# Altium PCB PCB.PcbDoc
Units mm, origin at the board's own origin, x right, y up, seen from the top; angles counter-clockwise.
Board outline 50 x 50 mm, 2 copper layers (Top Layer, Bottom Layer); 15 components, 14 nets, 64 pads, 0 vias.
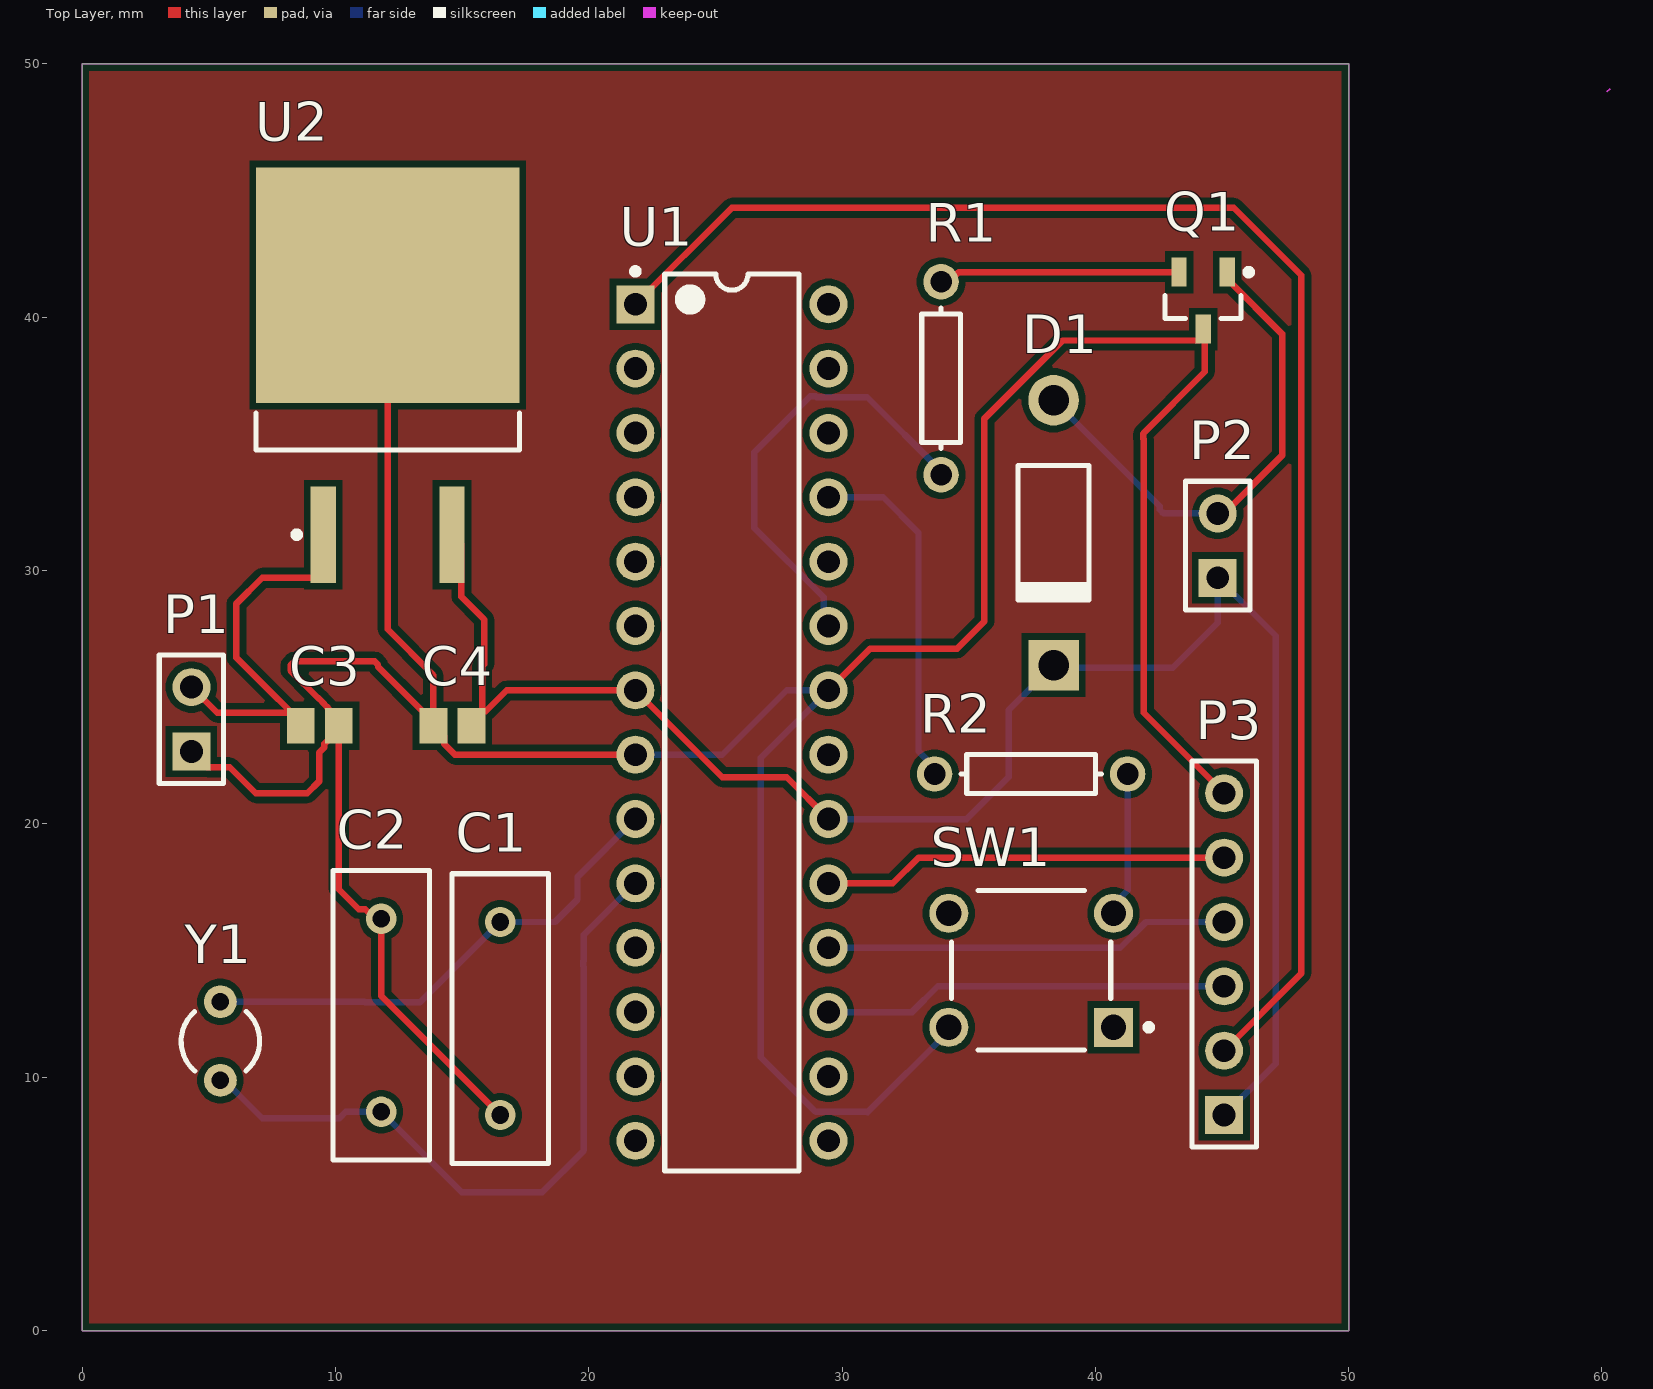
[diagram p0: Top Layer view]
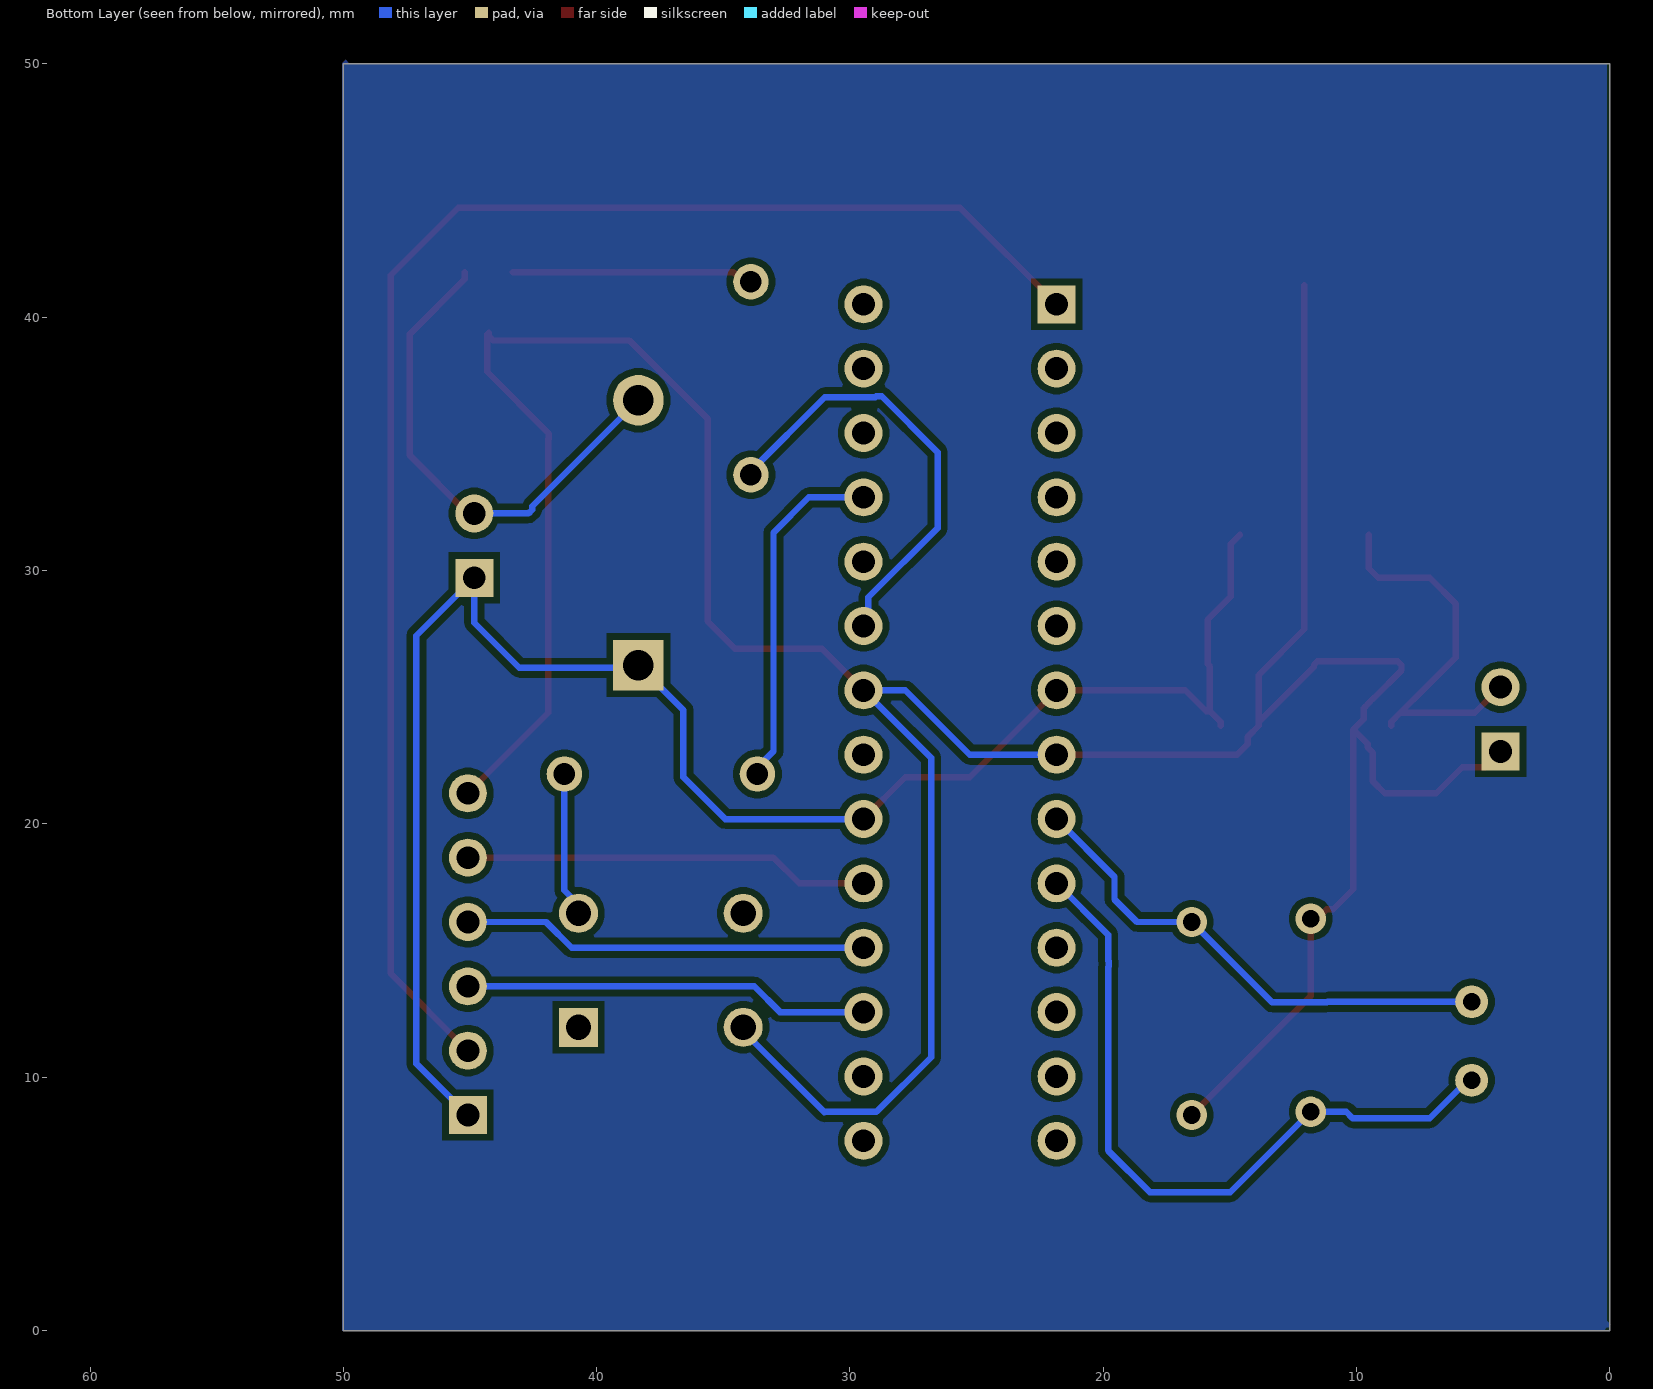
[diagram p1: Bottom Layer view, seen from below]

## Layer stack, top to bottom
Top Solder: solder mask 0.0102, Solder Resist, Dk 3.5
Top Layer: signal copper 0.0356
Dielectric 1: dielectric 0.32, FR-4, Dk 4.8
Bottom Layer: signal copper 0.0356
Bottom Solder: solder mask 0.0102, Solder Resist, Dk 3.5

## Board outline
0,0 0,50 50,50 50,0

## Design rules (kind name [scope] priority, off if disabled: settings)
Clearance [All] p1: gap=0.254 ignorepadtopadclearanceinfootprint=FALSE except(0: Arc-Hole Track-Hole SMDPad-Hole THPad-Hole Via-Hole Fill-Hole Poly-Hole Region-Hole Text-Hole)
PolygonConnect [All] p1: connectstyle=Relief reliefconductorwidth=0.254 reliefentries=4 polygonreliefangle="90 Angle" airgapwidth=0.254
RoutingVias [All] p1: holewidth=0.711 width=1.27 viastyle="Through Hole" minholewidth=0.711 minwidth=1.27 maxholewidth=0.711 maxwidth=1.27
SolderMaskExpansion [All] p1: expansion=0.102 istentingtop=FALSE
Width [All] p1: maxlimit=0.254 minlimit=0.254 preferedwidth=0.254
30 further rules are at their usual default settings.

## Classes and differential pairs
component class SCHEMATIC: C1 C2 C3 C4 D1 P1 P2 Q1 R1 R2 SW1 U1 U2 Y1

## Components (designator, comment, footprint, x,y, rotation, side; value= is the part's Value field where it differs from the comment)
C1 "22pF" RAD-0.3 16.51,12.319 r90 top value=100nF
C2 "22pF" RAD-0.3 11.811,12.446 r270 top value=100nF
C3 "330nF" C0805 9.386,23.876 r0 top value=100pF
C4 "100nF" C0805 14.617,23.876 r180 top value=100pF
D1 "1N4001" DO-41 38.354,31.496 r270 top
P1 "POWER" HDR1X2 4.318,22.86 r90 top (schematic designator ?)
P2 "SPEAKER" HDR1X2 44.831,29.718 r90 top (schematic designator P?)
P3 "USBASP" HDR1X6 45.085,8.509 r90 top
Q1 "NPN" SOT-23B_N 44.257,40.658 r270 top
R1 "220R" AXIAL-0.3 33.909,37.592 r90 top value=470
R2 "Res1" AXIAL-0.3 37.465,21.971 r0 top value=10k
SW1 "" FP-1-1825910-0-MFG 37.465,14.224 r0 top
U1 "ATmega328P-PU" 28P3 25.654,24.003 r0 top
U2 "L7805CD2T-TR" TO-263_N 12.065,37.719 r90 top
Y1 "XTAL" R38 5.461,11.43 r0 top (schematic designator Y?)

## Footprints (in the part's own frame and the unit in brackets; to place one, negate y for a bottom-side part, rotate by r counter-clockwise, add the part's x,y. Pads: shape width x height; smd on the part's side, far side on the other; paste and mask are expansions set on the pad)
28P3 [mm] "28-Pin Plastic Dual In-Line Package (PDIP)"
  rect 1.5x1.5 hole 0.9: 1(-3.81,16.51)
  round 1.5 hole 0.9: 2(-3.81,13.97) 3(-3.81,11.43) 4(-3.81,8.89) 5(-3.81,6.35) 6(-3.81,3.81) 7(-3.81,1.27) 8(-3.81,-1.27) 9(-3.81,-3.81) 10(-3.81,-6.35) 11(-3.81,-8.89) 12(-3.81,-11.43) 13(-3.81,-13.97) 14(-3.81,-16.51) 15(3.81,-16.51) 16(3.81,-13.97) 17(3.81,-11.43) 18(3.81,-8.89) 19(3.81,-6.35) 20(3.81,-3.81) 21(3.81,-1.27) 22(3.81,1.27) 23(3.81,3.81) 24(3.81,6.35) 25(3.81,8.89) 26(3.81,11.43) 27(3.81,13.97) 28(3.81,16.51)
  silkscreen extent -3.93,-17.7 2.65,17.93, body extent -3.6,-17.65 3.6,17.65, height 4.58
AXIAL-0.3 [mm] "Axial Device, Thru-Hole; 2 Leads; 0.3 in Pin Spacing"
  round 1.4 hole 0.85: 1(-3.81,0) 2(3.81,0)
  silkscreen extent -2.77,-0.76 2.77,0.76
C0805 [mm] "Chip Capacitor, Body 2.0x1.3mm, IPC High Density"
  rect 1.1x1.4 smd: 1(-0.75,0) 2(0.75,0)
  body extent -1.1,-0.72 1.1,0.72, height 1.4
DO-41 [mm] "Diode, Axial; Body 5.2 x 2.7 mm (LxDia. max), Lead Dia. 0.86 mm (max)"
  round 2 hole 1.2: 1(-5.23,0)
  rect 2x2 hole 1.2: 2(5.23,0)
  silkscreen extent -2.65,-1.4 2.75,1.4
FP-1-1825910-0-MFG [mm]
  rect 1.54x1.54 hole 0.99 paste-1000 mask+0: 1(3.25,-2.25)
  round 1.54 hole 0.99 paste-1000 mask+0: 2(-3.25,-2.25) 3(3.25,2.25) 4(-3.25,2.25)
  silkscreen extent -3.15,-3.15 4.77,3.15, body extent -4.12,-3.24 4.12,3.24, height 0.25
HDR1X2 [mm] "Connector; Header; 2 Position"
  rect 1.5x1.5 hole 0.9: 1(0,0)
  round 1.5 hole 0.9: 2(2.54,0)
  silkscreen extent -1.27,-1.27 3.81,1.27
HDR1X6 [mm] "Connector; Header; 6 Position"
  rect 1.5x1.5 hole 0.9: 1(0,0)
  round 1.5 hole 0.9: 2(2.54,0) 3(5.08,0) 4(7.62,0) 5(10.16,0) 6(12.7,0)
  silkscreen extent -1.27,-1.27 13.97,1.27
R38 [mm] "Crystal, Thru-Hole; 2 Leads; Body 3.1 x 8.2 mm (Dia.xH)"
  round 1.3 hole 0.7: 1(0,1.55) 2(0,-1.55)
  silkscreen extent -1.55,-1.19 1.55,1.17
RAD-0.3 [mm] "Radial Cap, Thru-Hole; 2 Leads; 0.3 in Pin Spacing"
  round 1.2 hole 0.7: 1(-3.81,0) 2(3.81,0)
  silkscreen extent -5.71,-1.91 5.71,1.91
SOT-23B_N [mm] "SOT23, 3-Leads, Body 2.9x1.3mm, Pitch 0.95mm, Lead Span 2.4mm, IPC Medium Density"
  rect 1.15x0.6 smd: 1(-1.125,0.95) 2(-1.125,-0.95) 3(1.125,0)
  silkscreen extent -1.25,-1.5 0.7,1.93, body extent -0.7,-1.5 0.7,1.5, height 1.14
TO-263_N [mm] "D2-PAK, 4-Leads, Body 9.2x10.2mm, Pitch 2.54mm, Lead Span 15.4mm, IPC Medium Density"
  rect 3.8x1 smd: 1(-6.3,2.54) 3(-6.3,-2.54)
  rect 9.3x10.4 smd: 4(3.55,0)
  silkscreen extent -6.42,-5.2 -1.5,5.2, body extent -2.95,-5.2 6.4,5.2, height 4.6

## Part data
C1 C2: library part Cap, "Capacitor", LatestRevisionDate=17-Jul-2002, LatestRevisionNote="Re-released for DXP Platform.", PackageDescription="Radial Cap, Thru-Hole; 2 Leads; 0.3 in Pin Spacing", PackageReference=RAD-0.3, Published=8-Jun-2000, Publisher="Altium Limited"
C3 C4: library part "Cap Pol3", "Polarized Capacitor (Surface Mount)", LatestRevisionDate=29-May-2009, LatestRevisionNote="IPC-7351 Footprint Added.", PackageDescription="Chip Capacitor", PackageReference=C0805, Published=8-Jun-2000, Publisher="Altium Limited"
D1: library part "Diode 1N4001", "1 Amp General Purpose Rectifier", Code_JEDEC=DO-204-AL, ComponentLink1Description="Manufacturer Link", ComponentLink1URL=http://www.fairchildsemi.com/, ComponentLink2Description=Datasheet, ComponentLink2URL=http://www.fairchildsemi.com/ds/1N%2F1N4001.pdf, DatasheetVersion=1998, LatestRevisionDate=17-Jul-2002, LatestRevisionNote="Re-released for DXP Platform.", PackageDescription="Diode, Axial; Body 5.2 x 2.7 mm (LxDia. max), Lead Dia. 0.86 mm (max)", PackageReference=DO-41, PackageVersion=Aug-1999, Published=8-Jun-2000, Publisher="Altium Limited"
P1 P2: library part "Header 2", "Header, 2-Pin", LatestRevisionDate=17-Jul-2002, LatestRevisionNote="Re-released for DXP Platform.", Publisher="Altium Limited"
P3: library part "Header 6", "Header, 6-Pin", LatestRevisionDate=17-Jul-2002, LatestRevisionNote="Re-released for DXP Platform.", Publisher="Altium Limited"
Q1: library part QNPN, "NPN Bipolar Transistor", LatestRevisionDate=29-May-2009, LatestRevisionNote="IPC-7351 Footprint Added.", PackageDescription="3-Pin SOT-23 Package 0.95 mm Pitch, 2.4 mm Lead Span", PackageReference=SOT-23B, PackageVersion=Aug-1999, Published=8-Jun-2000, Publisher="Altium Limited"
R1: library part Res1, "Resistor", LatestRevisionDate=17-Jul-2002, LatestRevisionNote="Re-released for DXP Platform.", PackageDescription="Axial Device, Thru-Hole; 2 Leads; 0.3 in Pin Spacing", PackageReference=AXIAL-0.3, Published=8-Jun-2000, Publisher="Altium Limited"
R2: "Resistor", LatestRevisionDate=17-Jul-2002, LatestRevisionNote="Re-released for DXP Platform.", PackageDescription="Axial Device, Thru-Hole; 2 Leads; 0.3 in Pin Spacing", PackageReference=AXIAL-0.3, Published=8-Jun-2000, Publisher="Altium Limited"
SW1: library part CMP-03407-000018-1, "SWITCH TACTILE SPST-NO 0.05A 24V", Actuator Color=Blue, Contact Current Rating=50mA, Contact Resistance=100mR, Max Operating Temperature=85°C, Max Voltage Rating (DC)=24V, Min Operating Temperature=-35°C, Operating Force=1.56N, Package Quantity=750, Actuator Length=3.4mm, Actuator Material=Nylon, Actuator Type=Standard, Contact Material=Brass, Contact Plating=Silver, Depth=5.99mm, Electrical Life=100000Cycles, Illumination Type=Non-Illuminated, Length=5.99mm, Max Current Rating=50mA, Mechanical Life=100000Cycles, Mount="Through Hole", Orientation=Straight, Packaging="Loose Piece", Radiation Hardening=No, RoHS Compliant=Yes, Series="FSMJ, Alcoswitch", Switch Function=Off-Mom, Switch Travel=0.25mm, Termination="PC Pins", Throw Configuration=SPST, Type=Switch, Voltage Rating (DC)=24V
U1: library part CMP-0095-00013-2, "8-bit AVR Microcontroller, 32KB Flash, 1KB EEPROM, 2KB SRAM, 28-pin PDIP, Industrial Grade (-40°C to 85°C)", ComponentLink1Description="Manufacturer URL", ComponentLink1URL=http://www.atmel.com/, ComponentLink2Description="ATmega48A/48PA/88A/88PA/168A/168PA/328/328P Datasheet", ComponentLink2URL=http://www.atmel.com/dyn/resources/prod_documents/8271.pdf, ComponentLink3Description="ATmega48A/48PA/88A/88PA/168A/168PA/328/328P Summary", ComponentLink3URL=http://www.atmel.com/dyn/resources/prod_documents/8271S.pdf, DatasheetVersion="revD, May-2011", PackageDescription="28-lead (0.300\"/7.62mm Wide) Plastic Dual Inline Package (PDIP)", PackageReference=28P3, PackageVersion="revB, Sep-2001", RevisionNote="DatasheetVersion updated. URLs added."
U2: library part CMP-0244-00213-1, "Positive Voltage Regulator, 3-Pin D2PAK, Tape and Reel", ComponentLink1Description="Manufacturer URL", ComponentLink1URL=http://www.st.com, ComponentLink2Description=Datasheet, ComponentLink2URL=http://www.st.com/internet/com/TECHNICAL_RESOURCES/TECHNICAL_LITERATURE/DATASHEET/CD00000444.pdf, DatasheetVersion=16/11/2011, PackageDescription="3-Pin Transistor Outline Package 2.54 mm Pitch, 15.4 mm Lead Span (D2PAK)", PackageReference=TO-263, PackageVersion=2011
Y1: "Crystal Oscillator", LatestRevisionDate=17-Jul-2002, LatestRevisionNote="Re-released for DXP Platform.", PackageDescription="Crystal, Thru-Hole; 2 Leads; Body 3.1 x 8.2 mm (Dia.xH)", PackageReference=R38, Published=8-Jun-2000, Publisher="Altium Limited"

## Nets (pads, with @x,y where several pads share a name; then routed paths per layer and width w, separated by ;. In a path a pad name is that pad's centre, name@x,y a point inside that pad or via, vN(x,y) a via of type N, cw(c..) or ccw(c..) an arc to the next point about the centre after c; other vN are vias at no path point)
GND: C1.1 C2.1 C3.2 C4.2 P1.1 P3.6 Q1.3 SW1.2 U1.8 U1.22 U2.4 | length 143.3
  Top Layer w0.254: P1.1 4.941,22.237 5.83,22.237 6.858,21.209 8.89,21.209 9.356,21.675 9.356,22.807 9.567,23.018 9.567,23.157 C3.2@10.136,23.726 ; U2.4 12.065,27.68 13.867,25.878 C4.2@13.867,24.026 ; C1.1 11.811,13.208 C2.1 11.555,16.256 11.174,16.637 10.922,16.637 10.136,17.423 C3.2@10.136,23.726 ; U1.8 14.721,22.733 14.29,23.164 14.29,23.453 C4.2 C4.2@13.867,24.026 ; U1.22 31.115,26.924 34.544,26.924 35.623,28.003 35.623,36.004 38.704,39.085 44.084,39.085 44.257,39.258 44.257,39.395 44.323,39.329 44.323,37.846 41.888,35.411 41.888,35.201 41.91,35.179 41.91,24.384 P3.6 ; C3.2@10.136,23.726 9.713,24.149 9.713,24.573 9.567,24.719 9.567,24.734 9.344,24.957 9.329,24.957 8.23,26.057 8.23,26.267 8.378,26.416 11.557,26.416 11.684,26.289 11.684,26.209 C4.2@13.867,24.026
  Bottom Layer w0.254: U1.8 25.273,22.733 27.813,25.273 U1.22 26.797,22.606 26.797,10.795 28.956,8.636 30.988,8.636 31.01,8.614 34.215,11.819 SW1.2
NetC1_2: C1.2 U1.9 Y1.1 | length 19.9
  Bottom Layer w0.254: Y1.1 11.15,12.98 11.176,12.954 13.335,12.954 C1.2 18.669,16.129 19.558,17.018 19.558,17.907 U1.9
NetC2_2: C2.2 U1.10 Y1.2 | length 28.5
  Bottom Layer w0.254: Y1.2 5.614,9.88 7.112,8.382 10.16,8.382 10.414,8.636 C2.2 14.986,5.461 18.161,5.461 19.812,7.112 19.812,14.351 19.79,14.373 19.79,14.583 19.812,14.605 19.812,15.621 U1.10
NetD1_1: D1.1 P2.2 Q1.1 | length 20
  Top Layer w0.254: P2.2 45.085,32.258 47.371,34.544 47.371,39.344 45.207,41.508 Q1.1
  Bottom Layer w0.254: D1.1 42.545,32.535 42.545,32.407 42.694,32.258 P2.2
NetP3_2: P3.2 U1.1 | length 60.8
  Top Layer w0.254: U1.1 25.654,44.323 45.466,44.323 48.133,41.656 48.133,14.097 P3.2
NetP3_3: P3.3 U1.17 | length 16
  Bottom Layer w0.254: U1.17 32.766,12.573 33.782,13.589 P3.3
NetP3_4: P3.4 U1.18 | length 16
  Bottom Layer w0.254: U1.18 40.982,15.113 41.998,16.129 P3.4
NetP3_5: P3.5 U1.19 | length 16
  Top Layer w0.254: U1.19 32.004,17.653 33.02,18.669 P3.5
NetQ1_2: Q1.2 R1.2 | length 9.6
  Top Layer w0.254: R1.2 34.219,41.402 34.6,41.783 Q1.2
NetR1_1: R1.1 U1.23 | length 17.7
  Bottom Layer w0.254: U1.23 29.274,28.003 29.274,28.944 26.543,31.675 26.543,34.671 28.75,36.878 28.96,36.878 28.996,36.842 31,36.842 33.909,33.933 R1.1
NetR2_1: R2.1 U1.25 | length 13.9
  Bottom Layer w0.254: U1.25 31.623,32.893 33.02,31.496 33.02,22.865 33.655,22.23 R2.1
NetR2_2: R2.2 SW1.3 | length 5.7
  Bottom Layer w0.254: SW1.3 40.715,16.822 41.275,17.382 R2.2
VCC: C4.1 D1.2 P2.1 P3.1 U1.7 U1.20 U2.3 | length 69.4
  Top Layer w0.254: U2.3 14.978,31.046 14.978,28.964 15.875,28.067 15.875,26.301 15.79,26.216 C4.1@15.79,24.449 ; C4.1 15.367,24.026 C4.1@15.79,24.449 ; U1.20 27.813,21.844 25.273,21.844 U1.7 16.764,25.273 15.94,24.449 C4.1@15.79,24.449
  Bottom Layer w0.254: U1.20 34.925,20.193 36.576,21.844 36.576,24.488 D1.2 38.458,26.162 43.053,26.162 44.831,27.94 P2.1 47.117,27.432 47.117,10.541 P3.1
VIN: C3.1 P1.2 U2.1 | length 15.6
  Top Layer w0.254: P1.2 5.334,24.384 C3.1@8.278,24.384 ; C3.1 8.636,24.026 C3.1@8.278,24.384 ; U2.1 9.525,30.091 9.152,29.718 7.112,29.718 6.096,28.702 6.096,26.566 7.262,25.4 C3.1@8.278,24.384
pads on no net: SW1.1 SW1.4 U1.2 U1.3 U1.4 U1.5 U1.6 U1.11 U1.12 U1.13 U1.14 U1.15 U1.16 U1.21 U1.24 U1.26 U1.27 U1.28

## Polygon pours and split planes (outlines as drawn)
no net on Top Layer "NONET_L01_P000" (solid, pour order 0): 0,0 0,50 50,50 50,0
no net on Bottom Layer "NONET_L02_P001" (solid, pour order 1): -0.127,0.127 0.127,0.381 0.127,50.038 49.784,50.038 49.911,50.165 50.038,50.038 50.038,0 0.254,0 0.127,0.127

## Keep-outs
Top Layer:
  lines w0.05: 60.198,48.895 60.325,49.022 ; 0,0 50,0 50,50 0,50 0,0